# Altium PCB LED_Controller.PcbDoc
Units mil, origin at the board's own origin, x right, y up, seen from the top; angles counter-clockwise.
Board outline 4000 x 2900 mil, 2 copper layers (Top Layer, Bottom Layer); 69 components, 85 nets, 346 pads, 18 vias.
Unrouted connection lines stored in the file: 208.
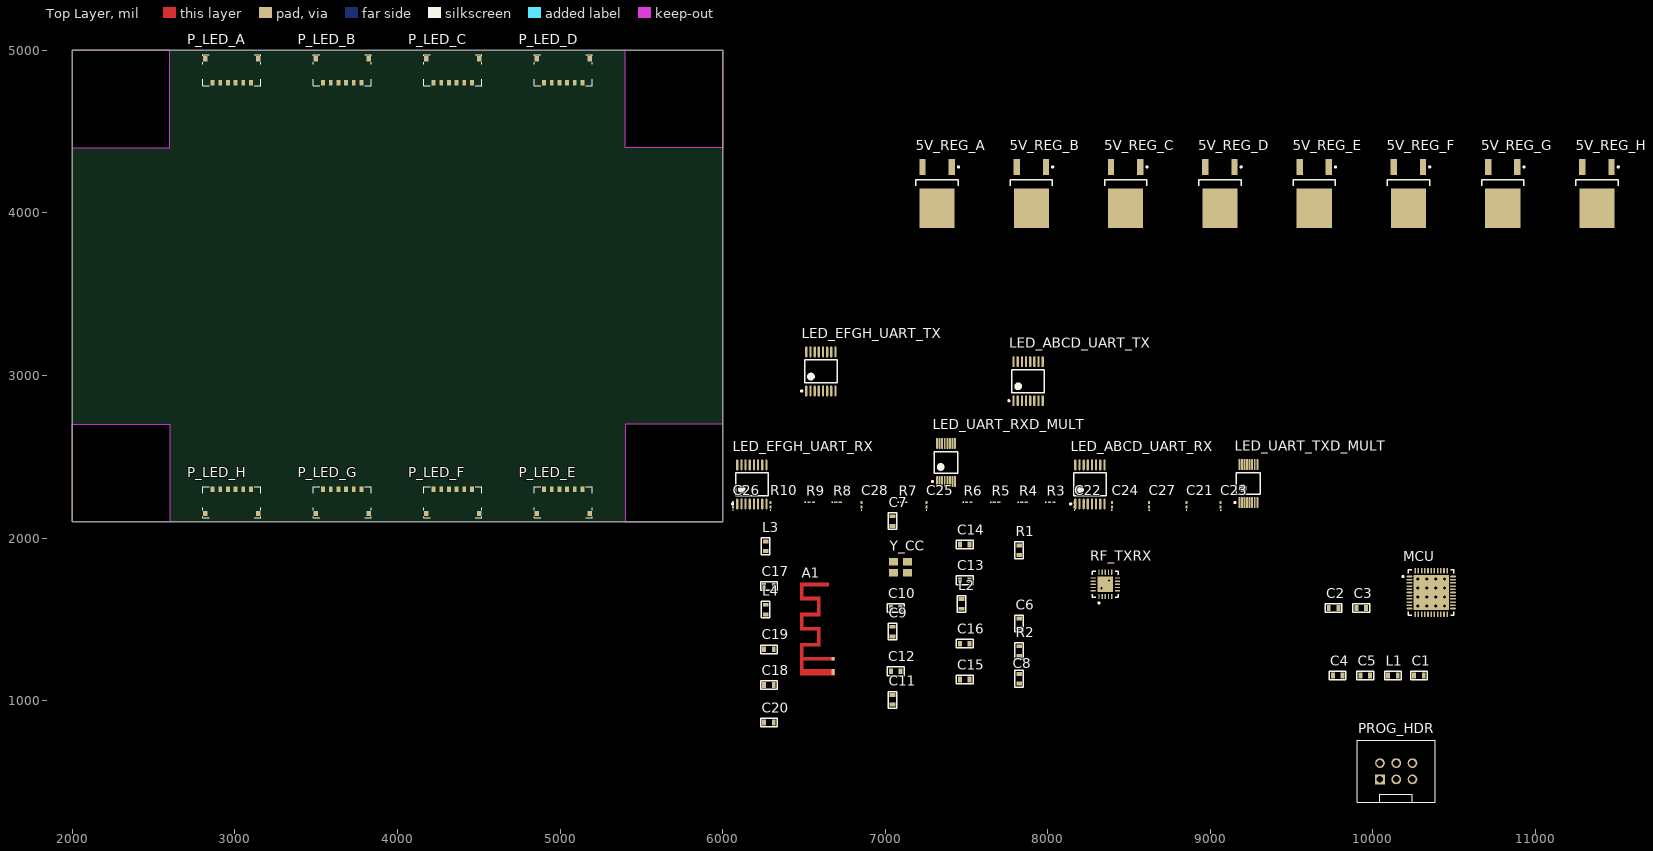
[diagram p0: Top Layer view]
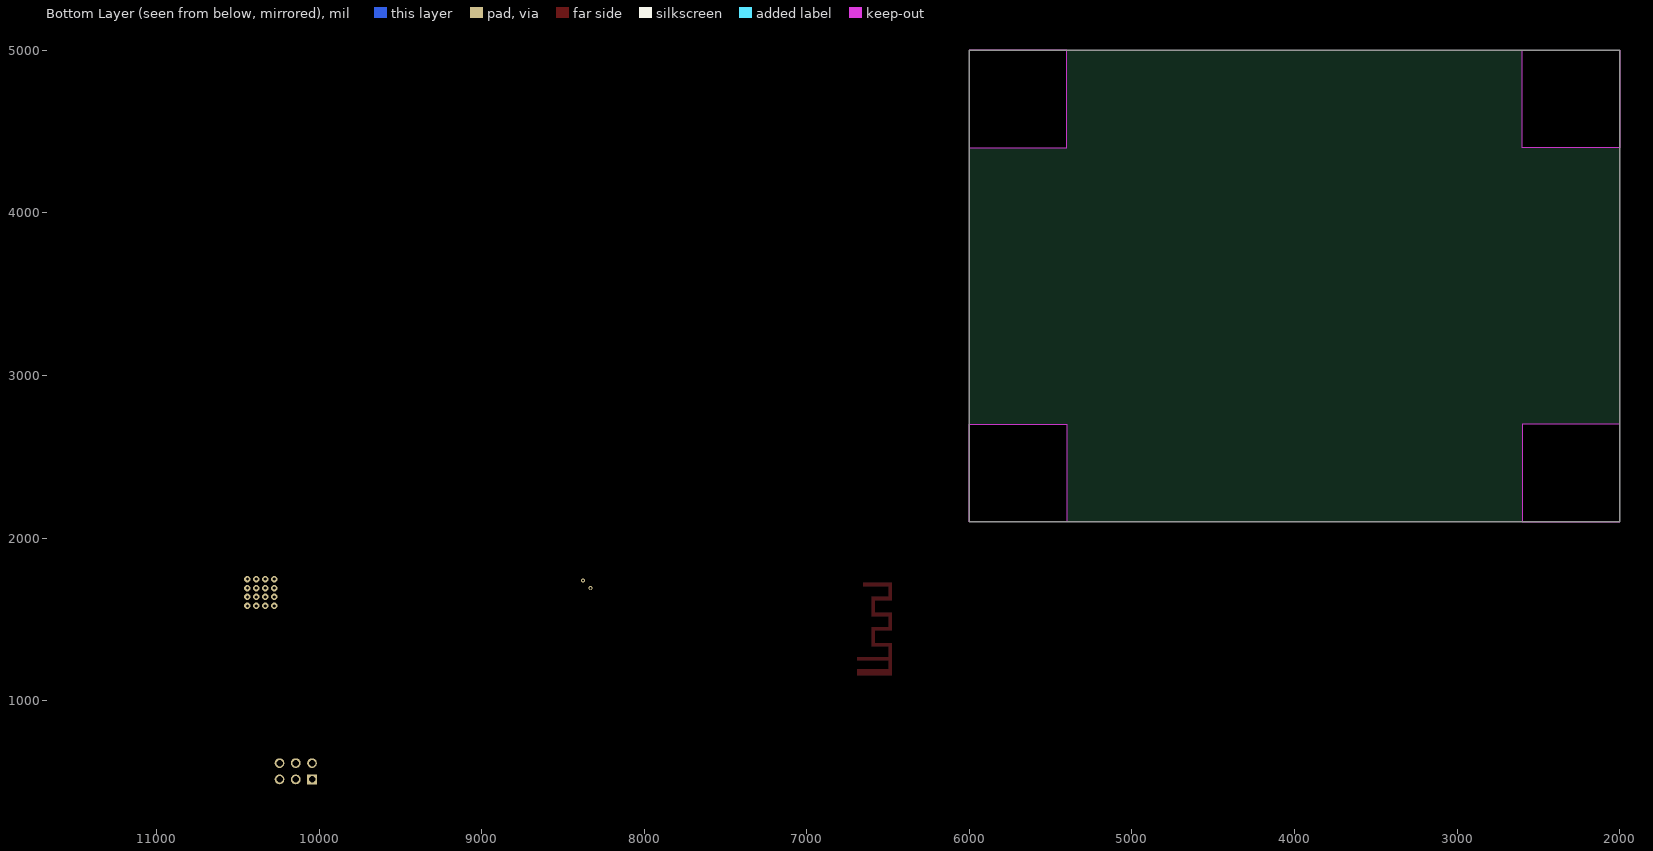
[diagram p1: Bottom Layer view, seen from below]

## Layer stack, top to bottom
Top Layer: signal copper 1.4
Dielectric: dielectric 12.6, FR-4, Dk 4.8
Bottom Layer: signal copper 1.4

## Board outline
2000,5000 2000,2100 6000,2100 6000,5000
cut-out: 6000,2100 6000,2700 5400,2700 5400,2100
cut-out: 2000,2100 2000,2700 2600,2700 2600,2100
cut-out: 2000,5000 2000,4400 2600,4400 2600,5000
cut-out: 5400,5000 6000,5000 6000,4400 5400,4400

## Design rules (kind name [scope] priority, off if disabled: settings)
Clearance [All] p1: gap=8
ComponentClearance [All] p1: gap=5 collisioncheckmode=3 verticalgap=10 showdistances=FALSE
HoleSize [All] p1: absolutevalues=TRUE maxlimit=100 minlimit=20 maxpercent=80.000 minpercent=20.000
MinimumSolderMaskSliver [All] p1: minsoldermaskwidth=4
PolygonConnect [All] p1: connectstyle=Relief reliefconductorwidth=10 reliefentries=4 polygonreliefangle="90 Angle"
RoutingVias [All] p1: holewidth=20 width=36 viastyle="Through Hole" minholewidth=20 minwidth=36 maxholewidth=20 maxwidth=36
SilkscreenOverComponentPads [All] p1: minsilkscreentomaskgap=10
SolderMaskExpansion [All] p1: expansion=2
Width [All] p1: maxlimit=100 minlimit=8 preferedwidth=10
24 further rules are at their usual default settings.

## Classes and differential pairs
component class LED_Controller: C1 C2 C3 C4 C5 L1 MCU
component class LED_Controller_Wireless: A1 C6 C7 C8 C9 C10 C11 C12 C13 C14 C15 C16 C17 C18 C19 C20 L2 L3 L4 R1 R2 RF_TXRX Y_CC
component class LED_Controller_Connectors: 5V_REG_A 5V_REG_B 5V_REG_C 5V_REG_D 5V_REG_E 5V_REG_F 5V_REG_G 5V_REG_H P_LED_A P_LED_B P_LED_C P_LED_D P_LED_E P_LED_F P_LED_G P_LED_H PROG_HDR
component class LED_Controller_UART_Multiplexer: C21 C22 C23 C24 C25 C26 C27 C28 LED_ABCD_UART_RX LED_ABCD_UART_TX LED_EFGH_UART_RX LED_EFGH_UART_TX LED_UART_RXD_MULT LED_UART_TXD_MULT R3 R4 R5 R6 R7 R8 R9 R10

## Components (designator, comment, footprint, x,y, rotation, side; value= is the part's Value field where it differs from the comment)
5V_REG_A "L7805CDT-TR" TO228P973X240-3N 7320,4120 r270 top
5V_REG_B "L7805CDT-TR" TO228P973X240-3N 7900,4120 r270 top
5V_REG_C "L7805CDT-TR" TO228P973X240-3N 8480,4120 r270 top
5V_REG_D "L7805CDT-TR" TO228P973X240-3N 9060,4120 r270 top
5V_REG_E "L7805CDT-TR" TO228P973X240-3N 9640,4120 r270 top
5V_REG_F "L7805CDT-TR" TO228P973X240-3N 10220,4120 r270 top
5V_REG_G "L7805CDT-TR" TO228P973X240-3N 10800,4120 r270 top
5V_REG_H "L7805CDT-TR" TO228P973X240-3N 11380,4120 r270 top
A1 "IFA" Meandered_Inverted_F_Antenna 6680,1175 r90 top
C1 "100nF" 0603#1 10285,1155 r0 top
C2 "100nF" 0603#1 9760,1570 r0 top
C3 "100nF" 0603#1 9930,1570 r0 top
C4 "100nF" 0603#1 9785,1155 r0 top
C5 "10uF" 0603#1 9955,1155 r0 top
C6 "100nF" 0603#1 7825,1475 r90 top
C7 "100nF" 0603#1 7045,2105 r90 top
C8 "220pF" 0603#1 7825,1135 r90 top
C9 "100nF" 0603#1 7045,1425 r90 top
C10 "220pF" 0603#1 7065,1570 r180 top
C11 "30pF" 0603#1 7045,1005 r90 top
C12 "30pF" 0603#1 7065,1180 r180 top
C13 "100nF" 0603#1 7490,1740 r180 top
C14 "220pF" 0603#1 7490,1960 r180 top
C15 "100pF 0603" 0603#1 7490,1130 r180 top
C16 "1.0 pF 0603" 0603#1 7490,1350 r180 top
C17 "100pF 0603" 0603#1 6285,1705 r180 top
C18 "1.8pF 0603" 0603#1 6285,1095 r180 top
C19 "1.5pF 0603" 0603#1 6285,1315 r180 top
C20 "1.0 pF 0603" 0603#1 6285,865 r180 top
C21 "100nF" 0603#2 8855,2205 r90 top
C22 "100nF" 0603#2 8165,2205 r90 top
C23 "10uF" 0603#2 9065,2205 r90 top
C24 "10uF" 0603#2 8395,2205 r90 top
C25 "100nF" 0603#2 7255,2205 r90 top
C26 "100nF" 0603#2 6065,2205 r90 top
C27 "100nF" 0603#2 8625,2205 r90 top
C28 "100nF" 0603#2 6855,2205 r90 top
L1 "120 OHM 0603" 0603#1 10125,1155 r0 top
L2 "1.2nH 0603" 0603#1 7470,1595 r90 top
L3 "1.2nH 0603" 0603#1 6265,1950 r90 top
L4 "1.2nH 0603" 0603#1 6265,1560 r90 top
LED_ABCD_UART_RX "SN65LVDS048A" "TI - PW / TSOP65P640X120-16N" 8260,2330 r90 top
LED_ABCD_UART_TX "SN65LVDS047" "TI - PW / TSOP65P640X120-16N" 7880,2965 r90 top
LED_EFGH_UART_RX "SN65LVDS048A" "TI - PW / TSOP65P640X120-16N" 6180,2330 r90 top
LED_EFGH_UART_TX "SN65LVDS047" "TI - PW / TSOP65P640X120-16N" 6605,3025 r90 top
LED_UART_RXD_MULT "SN74CBTLV3257" "TI - DGV16 / TSSOP40P640X120-16N" 7375,2465 r90 top
LED_UART_TXD_MULT "SN74CBTLV3257" "TI - DGV16 / TSSOP40P640X120-16N" 9235,2335 r90 top
MCU "IC - ATXMEGA32A4" QFN50P700X700X100-44N 10360,1665 r0 top
P_LED_A "H - Pico-EZMate 6" "Molex - 78171-6006" 2980,4800 r180 top
P_LED_B "H - Pico-EZMate 6" "Molex - 78171-6006" 3660,4800 r180 top
P_LED_C "H - Pico-EZMate 6" "Molex - 78171-6006" 4340,4800 r180 top
P_LED_D "H - Pico-EZMate 6" "Molex - 78171-6006" 5020,4800 r180 top
P_LED_E "H - Pico-EZMate 6" "Molex - 78171-6006" 5020,2300 r0 top
P_LED_F "H - Pico-EZMate 6" "Molex - 78171-6006" 4340,2300 r0 top
P_LED_G "H - Pico-EZMate 6" "Molex - 78171-6006" 3660,2300 r0 top
P_LED_H "H - Pico-EZMate 6" "Molex - 78171-6006" 2980,2300 r0 top
PROG_HDR "H - 2x3 100mil pitch" 75869-131LF 10045,515 r0 top
R1 "56k" 0603#1 7825,1925 r90 top
R2 "10k" 0603#1 7825,1305 r90 top
R3 "100" 0603#2 8025,2220 r0 top
R4 "100" 0603#2 7855,2220 r0 top
R5 "100" 0603#2 7685,2220 r0 top
R6 "100" 0603#2 7515,2220 r0 top
R7 "100" 0603#2 7115,2220 r0 top
R8 "100" 0603#2 6710,2220 r0 top
R9 "100" 0603#2 6545,2220 r0 top
R10 "100" 0603#2 6295,2205 r90 top
RF_TXRX "IC - CC2500" "TI - RTK / QFN50P400X400X90-20N" 8355,1715 r90 top
Y_CC "36MHz 18pF" 7M-36.000MAAJ-T 7095,1820 r180 top

## Footprints (in the part's own frame and the unit in brackets; to place one, negate y for a bottom-side part, rotate by r counter-clockwise, add the part's x,y. Pads: shape width x height; smd on the part's side, far side on the other; paste and mask are expansions set on the pad)
7M-36.000MAAJ-T [mm] "CRYSTAL 36.000 MHZ 18PF SMD"
  rect 1.4x1.2 smd: 1(-1.1,-0.85) 2(1.1,0.85) 3(-1.1,0.85) 3(1.1,-0.85)
0603#1 [mm] "Non polarized 0603 footprint"
  rect 0.6x0.9 smd: 1(-0.762,0) 2(0.738,0)
  silkscreen extent -1.31,-0.67 1.29,0.67
0603#2 [mm] "Chip Inductor, Body 0.6x0.3mm, IPC High Density"
  rect 0.5x0.3 smd: 1(-0.35,0) 2(0.35,0)
  silkscreen extent -0.9,-0.05 -0.9,0.05, body extent -0.33,-0.18 0.33,0.18, height 0.55
75869-131LF [mil] "CONN HEADER 6POS DUAL VERT PCB"
  rect 60x60 hole 40: 1(0,0)
  round 60 hole 40: 2(0,100) 3(100,0) 4(100,100) 5(200,0) 6(200,100)
  silkscreen extent -140,-140 340,240, body extent -140,-140 340,240, height 377
Meandered_Inverted_F_Antenna [mm]
  rect 0.5x0.5 smd mask+0: 1(2.1,0)
  rect 0.9x0.5 smd mask+0: 2(0,0)
  Top Layer region: 13.95,5.15 13.45,5.15 13.45,0.71 13.95,0.71
  Top Layer region: 9.25,5.15 8.75,5.15 8.75,2.01 9.25,2.01
  Top Layer region: 8.75,2.01 8.75,2.51 11.75,2.51 11.75,2.01
  Top Layer region: 11.75,5.15 11.25,5.15 11.25,2.01 11.75,2.01
  Top Layer region: 11.25,4.65 11.25,5.15 13.95,5.15 13.95,4.65
  Top Layer region: 6.55,4.65 6.55,5.15 9.25,5.15 9.25,4.65
  Top Layer region: 7.05,5.15 6.55,5.15 6.55,2.01 7.05,2.01
  Top Layer region: 4.05,2.01 4.05,2.51 7.05,2.51 7.05,2.01
  Top Layer region: 4.55,5.15 4.05,5.15 4.05,2.01 4.55,2.01
  Top Layer region: 1.85,-0.25 1.85,5.15 2.35,5.15 2.35,-0.25
  Top Layer region: -0.45,4.65 -0.45,5.15 4.55,5.15 4.55,4.65
  Top Layer region: -0.45,-0.25 -0.45,5.15 0.45,5.15 0.45,-0.25
"Molex - 78171-6006" [mm] "CONN HEADER 6POS 1.20MM R/A SMD"
  rect 0.7x0.8 smd: 0(-4.15,-3.775) 0(4.15,-3.775)
  rect 0.6x0.85 smd: 1(-3,0) 2(-1.8,0) 3(-0.6,0) 4(0.6,0) 5(1.8,0) 6(3,0)
  silkscreen extent -4.5,-4.43 4.5,0.4, body extent -4.5,-4.43 4.5,0.4, height 1.65
QFN50P700X700X100-44N [mm] "QFN, 44-Leads, Body 7.1x7.1mm (max), Pitch 0.50mm, IPC Medium Density"
  oval 0.9x0.25 smd: 1(-3.4,2.5) 2(-3.4,2) 3(-3.4,1.5) 4(-3.4,1) 5(-3.4,0.5) 6(-3.4,0) 7(-3.4,-0.5) 8(-3.4,-1) 9(-3.4,-1.5) 10(-3.4,-2) 11(-3.4,-2.5) 23(3.4,-2.5) 24(3.4,-2) 25(3.4,-1.5) 26(3.4,-1) 27(3.4,-0.5) 28(3.4,0) 29(3.4,0.5) 30(3.4,1) 31(3.4,1.5) 32(3.4,2) 33(3.4,2.5)
  oval 0.25x0.9 smd: 12(-2.5,-3.4) 13(-2,-3.4) 14(-1.5,-3.4) 15(-1,-3.4) 16(-0.5,-3.4) 17(0,-3.4) 18(0.5,-3.4) 19(1,-3.4) 20(1.5,-3.4) 21(2,-3.4) 22(2.5,-3.4) 34(2.5,3.4) 35(2,3.4) 36(1.5,3.4) 37(1,3.4) 38(0.5,3.4) 39(0,3.4) 40(-0.5,3.4) 41(-1,3.4) 42(-1.5,3.4) 43(-2,3.4) 44(-2.5,3.4)
  rect 5.5x5.5 smd: 45(0,0)
  silkscreen extent -4.52,-3.55 3.55,3.55, body extent -3.55,-3.55 3.55,3.55, height 1
"TI - DGV16 / TSSOP40P640X120-16N" [mm] "TSSOP, 16-Leads, Body 3.7x4.5mm (max), Pitch 0.40mm, IPC Medium Density"
  oval 1.75x0.3 smd: 1(-2.975,1.4) 2(-2.975,1) 3(-2.975,0.6) 4(-2.975,0.2) 5(-2.975,-0.2) 6(-2.975,-0.6) 7(-2.975,-1) 8(-2.975,-1.4) 9(2.975,-1.4) 10(2.975,-1) 11(2.975,-0.6) 12(2.975,-0.2) 13(2.975,0.2) 14(2.975,0.6) 15(2.975,1) 16(2.975,1.4)
  silkscreen extent -3.1,-1.85 1.7,2.22, body extent -2.25,-1.85 2.25,1.85, height 1.2
"TI - PW / TSOP65P640X120-16N" [mm] "TSOP, 16-Leads, Body 5.1x4.5mm (max), Pitch 0.65mm, IPC Medium Density"
  oval 1.7x0.35 smd: 1(-3.05,2.275) 2(-3.05,1.625) 3(-3.05,0.975) 4(-3.05,0.325) 5(-3.05,-0.325) 6(-3.05,-0.975) 7(-3.05,-1.625) 8(-3.05,-2.275) 9(3.05,-2.275) 10(3.05,-1.625) 11(3.05,-0.975) 12(3.05,-0.325) 13(3.05,0.325) 14(3.05,0.975) 15(3.05,1.625) 16(3.05,2.275)
  silkscreen extent -3.17,-2.55 1.8,3.12, body extent -2.25,-2.55 2.25,2.55, height 1.2
"TI - RTK / QFN50P400X400X90-20N" [mil] "QFN, 20-Leads, Body 4.1x4.1mm (max), Pitch 0.50mm, IPC Medium Density"
  oval 33x8 smd: 1(-74.8,39.37) 2(-74.8,19.68) 3(-74.8,0) 4(-74.8,-19.69) 5(-74.8,-39.37) 11(74.8,-39.37) 12(74.8,-19.69) 13(74.8,0) 14(74.8,19.68) 15(74.8,39.37)
  oval 8x33 smd: 6(-39.37,-74.8) 7(-19.68,-74.8) 8(0,-74.8) 9(19.69,-74.8) 10(39.37,-74.8) 16(39.37,74.8) 17(19.69,74.8) 18(0,74.8) 19(-19.68,74.8) 20(-39.37,74.8)
  rect 95x95 smd: 21(0,0)
  silkscreen extent -119,-81 81,81, body extent -81,-81 81,81, height 35
TO228P973X240-3N [mm] "D-PAK, 3-Pads, Body 6.2x6.6mm (max), IPC Medium Density"
  rect 2.5x1 smd: 1(-4.15,2.28) 3(-4.15,-2.28)
  rect 6.2x5.5 smd: 4(2.3,0)
  silkscreen extent -4.27,-3.3 -1.2,3.46, body extent -2.15,-3.3 4.05,3.3, height 2.4

## Part data
5V_REG_A 5V_REG_B 5V_REG_C 5V_REG_D 5V_REG_E 5V_REG_F 5V_REG_G 5V_REG_H: library part "IC - L7805CDT-TR", "IC REG POS 1.5A 5V PREC DPAK"
A1: library part Meandered_Inverted_F_Antenna
C1 C2 C3 C4 C6 C7 C9 C13 C21 C22 C25 C26 C27 C28: library part "CP - 100nF 0603", "CAP CER .10UF 50V X5R 0603"
C5 C23 C24: library part "CP - 10uF 0603", "CAP CER 10000PF 50V X7R 0603"
C8 C10 C14: library part "CP - 220pF 0603", "CAP CER 220PF 50V NP0 0603"
C11 C12: library part "CP - 30pF 0603", "CAP CER 30PF 50V C0G 0603"
C15 C17: library part "CP - 100pF 0603", "CAP CERM 100PF 5% 50V NP0 0603"
C16 C20: library part "CP - 1.0pF 0603", "CAP CER 1.0PF 50V C0G 0603"
C18: library part "CP - 1.8pF 0603", "CAP CER 1.8PF 50V C0G 0603"
C19: library part "CP - 1.5pF 0603", "CAP CER 1.5PF 50V C0G 0603"
L1: library part "L - Ferrite Bead 120 Ohm 0603", "FERRITE BEAD 120 OHM 0603"
L2 L3 L4: library part "L - 1.2nH 0603", "INDUCTOR HI FREQ 1.2+/-0.3NH"
LED_ABCD_UART_RX LED_EFGH_UART_RX: library part "IC - SN65LVDS048A", "LVDS QUAD DIFFERENTIAL LINE RECEIVER"
LED_ABCD_UART_TX LED_EFGH_UART_TX: library part "IC - SN65LVDS047", "IC LVDS QUAD LINE DRIVER"
LED_UART_RXD_MULT LED_UART_TXD_MULT: library part "IC - SN74CBTLV3257", "Low-Voltage 4-Bit 1-of-2 FET Multiplexer/Demultiplexer"
MCU: "MCU AVR 32K FLASH 1.6V 44-QFN"
P_LED_A P_LED_B P_LED_C P_LED_D P_LED_E P_LED_F P_LED_G P_LED_H: "CONN HEADER 6POS 1.20MM R/A SMD"
PROG_HDR: "CONN HEADER 6POS DUAL VERT PCB"
R1: library part "RS - 56k 0603", "RES 56K OHM 1/10W 5% 0603 SMD"
R2: library part "RS - 10k 0603", "RES 10.0K OHM 1/10W 1% 0603 SMD"
R3 R4 R5 R6 R7 R8 R9 R10: library part "RS - 100 0603", "RES 100 OHM 1/10W 1% 0603 SMD"
RF_TXRX: "IC RF TXRX SNGL-CHIP LP 20-QFN"
Y_CC: library part "X - 36MHz 18pF", "CRYSTAL 36.000 MHZ 18PF SMD"

## Via types
v1: diameter 40, hole 20, Top Layer to Bottom Layer, 16 vias
v2: diameter 25, hole 13, Top Layer to Bottom Layer, tented top, 2 vias

## Nets (pads, with @x,y where several pads share a name; then routed paths per layer and width w, separated by ;. In a path a pad name is that pad's centre, name@x,y a point inside that pad or via, vN(x,y) a via of type N, cw(c..) or ccw(c..) an arc to the next point about the centre after c; other vN are vias at no path point)
AVCC: C4.2 C5.2 L1.1 MCU.39
CS: MCU.24 R2.1 RF_TXRX.7
GND: 5V_REG_A.4 5V_REG_B.4 5V_REG_C.4 5V_REG_D.4 5V_REG_E.4 5V_REG_F.4 5V_REG_G.4 5V_REG_H.4 A1.2 C1.1 C2.1 C3.1 C4.1 C5.1 C6.2 C7.1 C8.1 C9.1 C10.1 C11.1 C12.1 C13.1 C14.1 C18.1 C19.1 C20.1 C21.1 C22.1 C23.1 C24.1 C25.1 C26.1 C27.1 C28.1 L2.2 LED_ABCD_UART_RX.12 LED_ABCD_UART_TX.5 LED_EFGH_UART_RX.12 LED_EFGH_UART_TX.5 LED_UART_RXD_MULT.8 LED_UART_TXD_MULT.8 MCU.8 MCU.18 MCU.30 MCU.38 P_LED_A.4 P_LED_B.4 P_LED_C.4 P_LED_D.4 P_LED_E.4 P_LED_F.4 P_LED_G.4 P_LED_H.4 PROG_HDR.6 R1.2 RF_TXRX.16 RF_TXRX.19 RF_TXRX.21 Y_CC.3
  other v2: 8331.38,1691.38 8378.62,1738.62
LED_A_RXD_+: LED_ABCD_UART_RX.2 P_LED_A.5 R3.1
LED_A_RXD_-: LED_ABCD_UART_RX.1 P_LED_A.6 R3.2
LED_A_TXD_+: LED_ABCD_UART_TX.15 P_LED_A.1
LED_A_TXD_-: LED_ABCD_UART_TX.16 P_LED_A.2
LED_B_RXD_+: LED_ABCD_UART_RX.3 P_LED_B.5 R4.1
LED_B_RXD_-: LED_ABCD_UART_RX.4 P_LED_B.6 R4.2
LED_B_TXD_+: LED_ABCD_UART_TX.14 P_LED_B.1
LED_B_TXD_-: LED_ABCD_UART_TX.13 P_LED_B.2
LED_C_RXD_+: LED_ABCD_UART_RX.6 P_LED_C.5 R5.1
LED_C_RXD_-: LED_ABCD_UART_RX.5 P_LED_C.6 R5.2
LED_C_TXD_+: LED_ABCD_UART_TX.11 P_LED_C.1
LED_C_TXD_-: LED_ABCD_UART_TX.12 P_LED_C.2
LED_D_RXD_+: LED_ABCD_UART_RX.7 P_LED_D.5 R6.1
LED_D_RXD_-: LED_ABCD_UART_RX.8 P_LED_D.6 R6.2
LED_D_TXD_+: LED_ABCD_UART_TX.10 P_LED_D.1
LED_D_TXD_-: LED_ABCD_UART_TX.9 P_LED_D.2
LED_E_RXD_+: LED_EFGH_UART_RX.2 P_LED_E.5 R7.1
LED_E_RXD_-: LED_EFGH_UART_RX.1 P_LED_E.6 R7.2
LED_E_TXD_+: LED_EFGH_UART_TX.15 P_LED_E.1
LED_E_TXD_-: LED_EFGH_UART_TX.16 P_LED_E.2
LED_F_RXD_+: LED_EFGH_UART_RX.3 P_LED_F.5 R8.1
LED_F_RXD_-: LED_EFGH_UART_RX.4 P_LED_F.6 R8.2
LED_F_TXD_+: LED_EFGH_UART_TX.14 P_LED_F.1
LED_F_TXD_-: LED_EFGH_UART_TX.13 P_LED_F.2
LED_G_RXD_+: LED_EFGH_UART_RX.6 P_LED_G.5 R9.1
LED_G_RXD_-: LED_EFGH_UART_RX.5 P_LED_G.6 R9.2
LED_G_TXD_+: LED_EFGH_UART_TX.11 P_LED_G.1
LED_G_TXD_-: LED_EFGH_UART_TX.12 P_LED_G.2
LED_H_RXD_+: LED_EFGH_UART_RX.7 P_LED_H.5 R10.1
LED_H_RXD_-: LED_EFGH_UART_RX.8 P_LED_H.6 R10.2
LED_H_TXD_+: LED_EFGH_UART_TX.10 P_LED_H.1
LED_H_TXD_-: LED_EFGH_UART_TX.9 P_LED_H.2
MISO: MCU.26 RF_TXRX.2
MOSI: MCU.25 RF_TXRX.20
NetA1_1: A1.1 C19.2 L3.2
NetC6_1: C6.1 RF_TXRX.5
NetC11_2: C11.2 RF_TXRX.8 Y_CC.1
NetC12_2: C12.2 RF_TXRX.10 Y_CC.2
NetC15_1: C15.1 RF_TXRX.13
NetC15_2: C15.2 C16.1 L2.1
NetC16_2: C16.2 C18.2 L3.1 L4.1
NetC17_1: C17.1 RF_TXRX.12
NetC17_2: C17.2 C20.2 L4.2
NetR1_1: R1.1 RF_TXRX.17
PDI_CLK: MCU.35 PROG_HDR.5
PDI_DATA: MCU.34 PROG_HDR.1
SCLK: MCU.27 RF_TXRX.1
UART_C0_RXD: LED_UART_RXD_MULT.4 MCU.12
UART_C0_RXD_1: LED_ABCD_UART_RX.15 LED_UART_RXD_MULT.2
UART_C0_RXD_2: LED_EFGH_UART_RX.15 LED_UART_RXD_MULT.3
UART_C0_TXD: LED_UART_TXD_MULT.4 MCU.13
UART_C0_TXD_1: LED_ABCD_UART_TX.2 LED_UART_TXD_MULT.2
UART_C0_TXD_2: LED_EFGH_UART_TX.2 LED_UART_TXD_MULT.3
UART_C1_RXD: LED_UART_RXD_MULT.7 MCU.16
UART_C1_RXD_1: LED_ABCD_UART_RX.14 LED_UART_RXD_MULT.5
UART_C1_RXD_2: LED_EFGH_UART_RX.14 LED_UART_RXD_MULT.6
UART_C1_TXD: LED_UART_TXD_MULT.7 MCU.17
UART_C1_TXD_1: LED_ABCD_UART_TX.3 LED_UART_TXD_MULT.5
UART_C1_TXD_2: LED_EFGH_UART_TX.3 LED_UART_TXD_MULT.6
UART_D0_RXD: LED_UART_RXD_MULT.16 MCU.22
UART_D0_RXD_1: LED_ABCD_UART_RX.11 LED_UART_RXD_MULT.14
UART_D0_RXD_2: LED_EFGH_UART_RX.11 LED_UART_RXD_MULT.15
UART_D0_TXD: LED_UART_TXD_MULT.16 MCU.23
UART_D0_TXD_1: LED_ABCD_UART_TX.6 LED_UART_TXD_MULT.14
UART_D0_TXD_2: LED_EFGH_UART_TX.6 LED_UART_TXD_MULT.15
UART_E0_RXD: LED_UART_RXD_MULT.13 MCU.32
UART_E0_RXD_1: LED_ABCD_UART_RX.10 LED_UART_RXD_MULT.11
UART_E0_RXD_2: LED_EFGH_UART_RX.10 LED_UART_RXD_MULT.12
UART_E0_TXD: LED_UART_TXD_MULT.13 MCU.33
UART_E0_TXD_1: LED_ABCD_UART_TX.7 LED_UART_TXD_MULT.11
UART_E0_TXD_2: LED_EFGH_UART_TX.7 LED_UART_TXD_MULT.12
UART_SEL: LED_UART_RXD_MULT.1 LED_UART_TXD_MULT.1
V_3.3: C1.2 C2.2 C3.2 C7.2 C8.2 C9.2 C10.2 C13.2 C14.2 C21.2 C22.2 C23.2 C24.2 C25.2 C26.2 C27.2 C28.2 L1.2 LED_ABCD_UART_RX.13 LED_ABCD_UART_TX.4 LED_EFGH_UART_RX.13 LED_EFGH_UART_TX.4 LED_UART_RXD_MULT.9 LED_UART_TXD_MULT.9 MCU.9 MCU.19 MCU.31 PROG_HDR.2 R2.2 RF_TXRX.4 RF_TXRX.9 RF_TXRX.11 RF_TXRX.14 RF_TXRX.15 RF_TXRX.18
V_5_A: 5V_REG_A.3 P_LED_A.3
V_5_B: 5V_REG_B.3 P_LED_B.3
V_5_C: 5V_REG_C.3 P_LED_C.3
V_5_D: 5V_REG_D.3 P_LED_D.3
V_5_E: 5V_REG_E.3 P_LED_E.3
V_5_F: 5V_REG_F.3 P_LED_F.3
V_5_G: 5V_REG_G.3 P_LED_G.3
V_5_H: 5V_REG_H.3 P_LED_H.3
V_IN: 5V_REG_A.1 5V_REG_B.1 5V_REG_C.1 5V_REG_D.1 5V_REG_E.1 5V_REG_F.1 5V_REG_G.1 5V_REG_H.1
pads on no net: LED_ABCD_UART_RX.9 LED_ABCD_UART_RX.16 LED_ABCD_UART_TX.1 LED_ABCD_UART_TX.8 LED_EFGH_UART_RX.9 LED_EFGH_UART_RX.16 LED_EFGH_UART_TX.1 LED_EFGH_UART_TX.8 LED_UART_RXD_MULT.10 LED_UART_TXD_MULT.10 MCU.1 MCU.2 MCU.3 MCU.4 MCU.5 MCU.6 MCU.7 MCU.10 MCU.11 MCU.14 MCU.15 MCU.20 MCU.21 MCU.28 MCU.29 MCU.36 MCU.37 MCU.40 MCU.41 MCU.42 MCU.43 MCU.44 MCU.45 P_LED_A.0 P_LED_B.0 P_LED_C.0 P_LED_D.0 P_LED_E.0 P_LED_F.0 P_LED_G.0 P_LED_H.0 PROG_HDR.3 PROG_HDR.4 RF_TXRX.3 RF_TXRX.6
copper on no net:
  other v1: 10277.32,1582.32 10332.44,1582.32 10387.56,1582.32 10442.68,1582.32 10277.32,1637.44 10332.44,1637.44 10387.56,1637.44 10442.68,1637.44 10277.32,1692.56 10332.44,1692.56 10387.56,1692.56 10442.68,1692.56 10277.32,1747.68 10332.44,1747.68 10387.56,1747.68 10442.68,1747.68

## Text inside footprints (layer, text, board x,y; h text height)
A1: Mechanical 15 "GND Plane Edge" at 6663.86,1193.5 h3.94 r90